# EAGLE board YMotor (EAGLE 9.6.2)
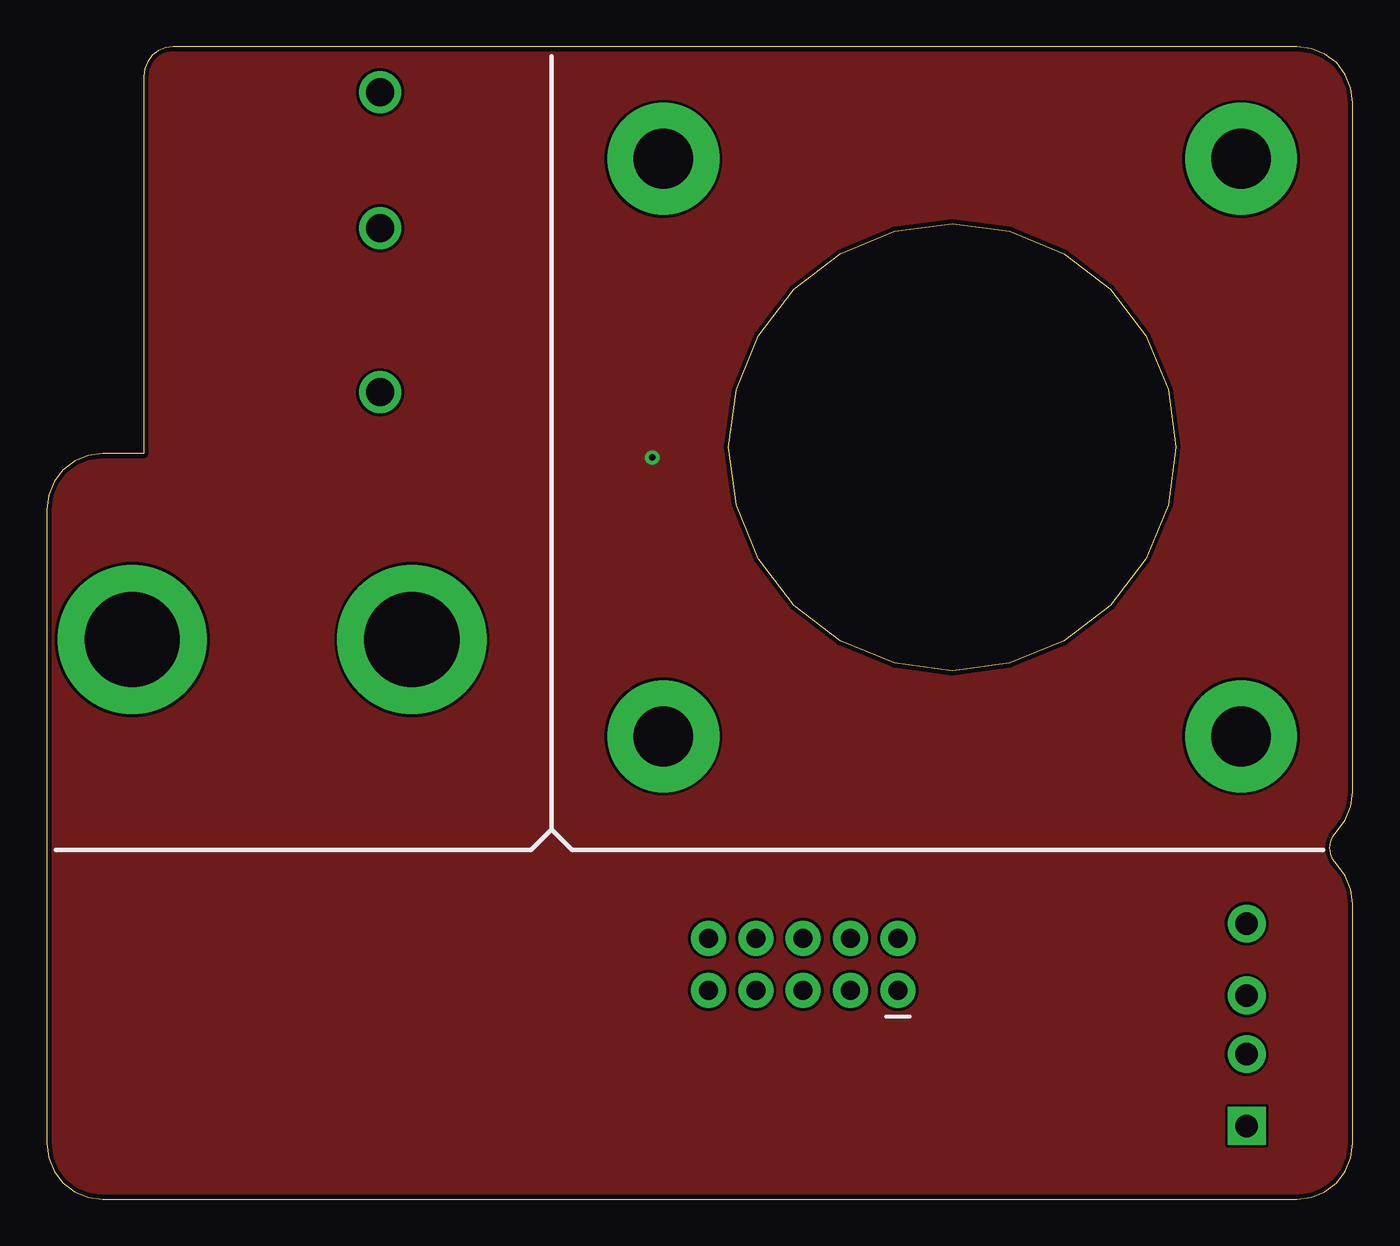
[diagram p0: board, top side]
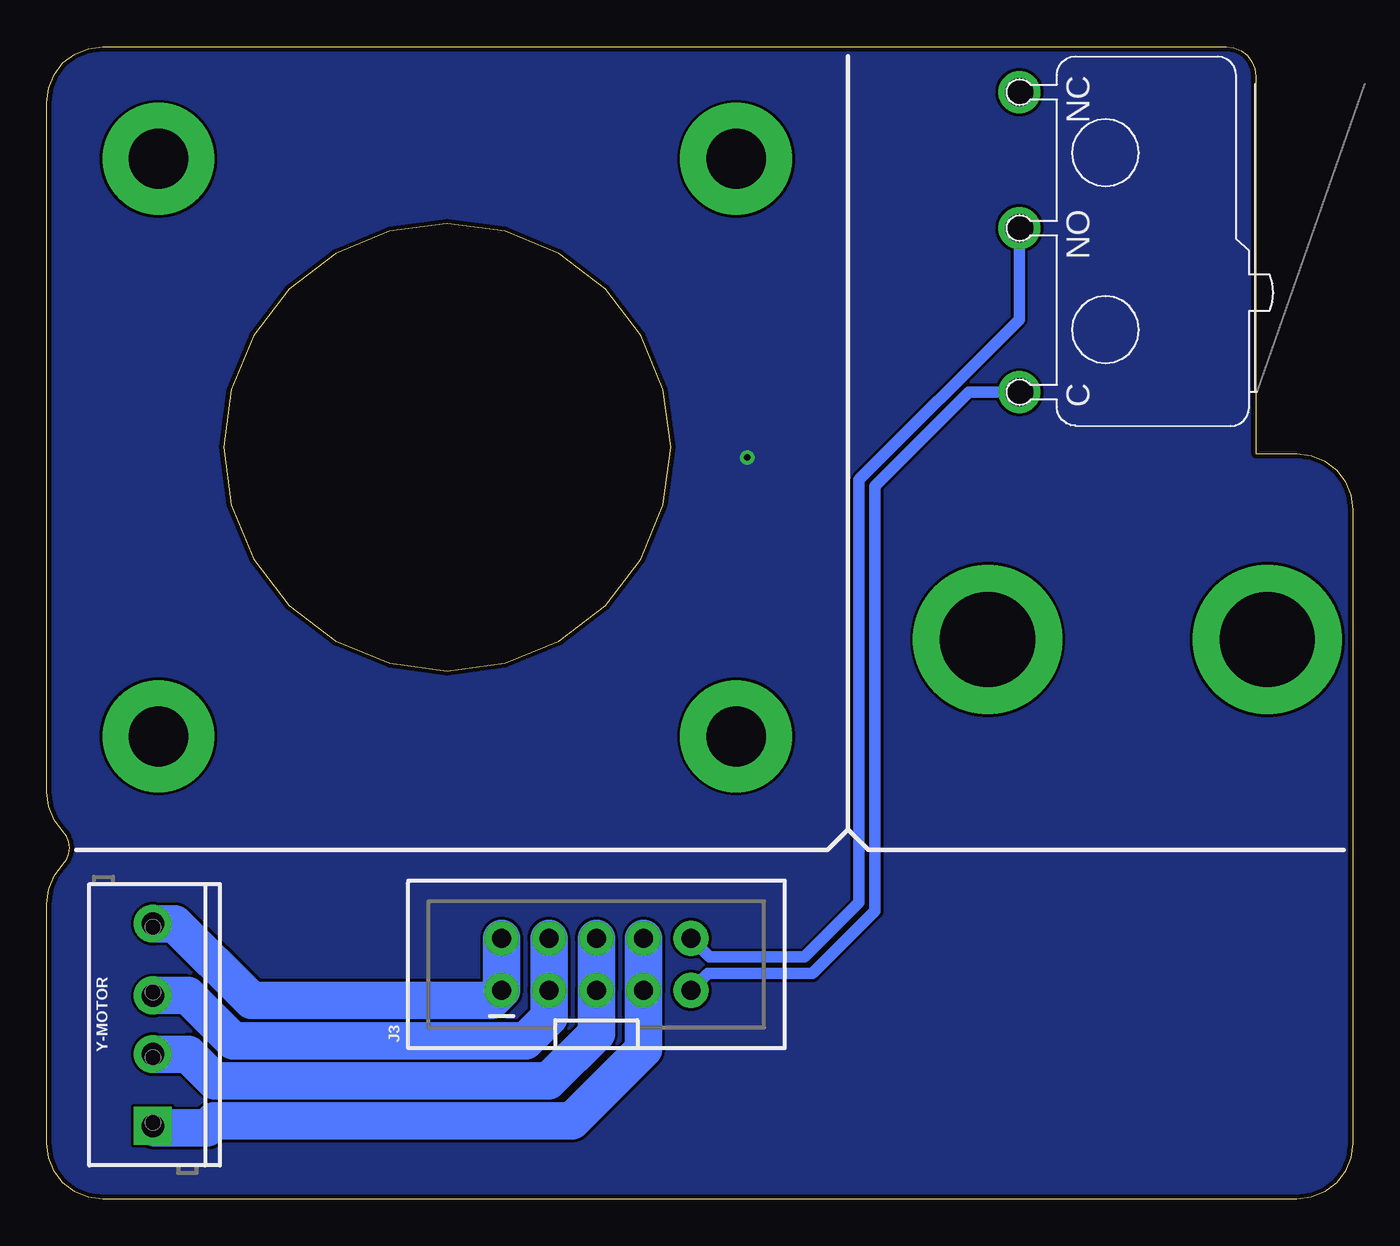
[diagram p1: board, bottom side, seen from below]

Size 70.1 x 61.85 mm. Coordinates in mm from the lower left corner, seen from the top.
Outline: 67.1,61.85 6.8,61.85 6.39,61.79 6,61.63 5.67,61.38 5.41,61.05 5.25,60.66 5.2,60.25 5.2,40 3,40 2.22,39.9 1.5,39.6 0.88,39.12 0.4,38.5 0.1,37.78 0,37 0,3 0.1,2.22 0.4,1.5 0.88,0.88 1.5,0.4 2.22,0.1 3,0 67.1,0 67.88,0.1 68.6,0.4 69.22,0.88 69.7,1.5 70,2.22 70.1,3 70.1,15.85 70,16.62 69.7,17.35 69.22,17.97 69.02,18.22 68.9,18.52 68.86,18.85 68.9,19.17 69.02,19.47 69.22,19.72 69.7,20.35 70,21.07 70.1,21.85 70.1,58.85 70,59.62 69.7,60.35 69.22,60.97 68.6,61.44 67.88,61.74 67.1,61.85
Outline: 36.6,40.35 37.01,43.45 38.21,46.35 40.11,48.83 42.6,50.74 45.49,51.94 48.6,52.35 51.71,51.94 54.6,50.74 57.09,48.83 58.99,46.35 60.19,43.45 60.6,40.35 60.19,37.24 58.99,34.35 57.09,31.86 54.6,29.95 51.71,28.75 48.6,28.35 45.49,28.75 42.6,29.95 40.11,31.86 38.21,34.35 37.01,37.24 36.6,40.35
Copper layers (1*16): Top 0.035mm / dielectric 1.5mm / Bottom 0.035mm
Design rules "default *": minimum track width 6mil, minimum drill 0.35mm, track to track 6mil, track to pad 6mil, pad to pad 6mil, via to via 6mil, smd to smd 6mil, copper to edge 10mil, drill to drill 6mil, minimum pad ring 10mil, minimum via ring 8mil, stop-mask expansion 4mil, vias tented up to drill 0mil, thermal gap 10mil
Net classes: 0 default: width 0.203 mm, clearance 0.152 mm

## Footprints (pad centres in the part's own frame; a part is rotated, then mirrored left to right if it is on the bottom)
2X5-SHROUDED_LOCK = drill 1.016 pad 1.88: 1 -1.397,5.08; 2 1.397,5.08; 3 -1.397,2.54; 4 1.397,2.54; 5 -1.397,0; 6 1.397,0; 7 -1.397,-2.54; 8 1.397,-2.54; 9 -1.397,-5.08; 10 1.397,-5.08
LEVERMICROPCB-LEFTANGLE = drill 1.5: C 7.3,-7.1; NC -8.8,-7.1; NO -1.5,-7.1
SCREWTERMINAL-3.5MM-4_LOCK = drill 1.2 pad 2.032 square: 1 -0.178,0 | drill 1.2 pad 2.032: 2 3.678,0; 3 6.822,0; 4 10.678,0

## Placement (x,y rotation side)
J3  [2X5-SHROUDED_LOCK]  40.6,12.6 90 bottom
U$1  Lever Microswitch Leftangle PCB mount, with Roller style lever, with a red roller  [LEVERMICROPCB-LEFTANGLE]  10.8,50.6 270 bottom
Y-MOTOR  [SCREWTERMINAL-3.5MM-4_LOCK]  64.4,4.1 90 bottom

## Library data of the parts
J3 = SparkFun-Connectors; PROD_ID: CONN-08671; SF_ID: PRT-08506
U$1 = Lever Microswitch Right Angle
Y-MOTOR = SparkFun-Connectors

## Nets
Y-ENDSTOP-C: J3.9 U$1.C
Y-ENDSTOP-NO: J3.10 U$1.NO
Y-MOTOR-1: J3.7 J3.8 Y-MOTOR.1
Y-MOTOR-2: J3.5 J3.6 Y-MOTOR.2
Y-MOTOR-3: J3.3 J3.4 Y-MOTOR.3
Y-MOTOR-4: J3.1 J3.2 Y-MOTOR.4

## Tracks (layer width: path | path; a pad name or v marks a point on that pad's centre or on a via)
GND  (via drill 0.35)
  other vias: 32.5,39.8
  pour Top: -2.9,64.2 -2.9,1.7 0.2,-1.4 70,-1.4 73.1,1.7 73.1,61.3 70.4,64 70.2,64.2
  pour Bottom: -3.5,64.4 -3.5,1.9 -0.4,-1.2 69.4,-1.2 72.5,1.9 72.5,61.5 69.8,64.2 69.6,64.4
N$21  (via drill 3.2 pad 6)
  other vias: 64.1,24.83
N$27  (via drill 5.1 pad 8)
  other vias: 4.6,30.03
N$28  (via drill 5.1 pad 8)
  other vias: 19.6,30.03
N$30  (via drill 3.2 pad 6)
  other vias: 33.1,24.83
N$31  (via drill 3.2 pad 6)
  other vias: 64.1,55.83
Y-ENDSTOP-C
  Bottom 0.61: U$1.C 20.6,43.3 25.64,38.26 25.64,15.46 29,12.1 34.62,12.1 J3.9
Y-ENDSTOP-NO
  Bottom 0.61: J3.10 34.52,13 29.42,13 26.5,15.92 26.5,38.6 17.9,47.2 U$1.NO
Y-MOTOR-1
  Bottom 2: Y-MOTOR.1 64.3,3.82 61.48,3.82 61.11,4.19 41.91,4.19 38.06,8.04 J3.7 J3.8
Y-MOTOR-2
  Bottom 2: Y-MOTOR.2 62.5,7.78 61.07,6.35 43.15,6.35 40.6,8.9 J3.5 J3.6
Y-MOTOR-3
  Bottom 2: Y-MOTOR.3 62.52,10.92 60.1,8.5 44.4,8.5 43.14,9.76 J3.3 J3.4
Y-MOTOR-4
  Bottom 2: Y-MOTOR.4 63.23,14.78 59.11,10.65 46.23,10.65 J3.1 J3.2
YMOTORGND  (via drill 3.2 pad 6)
  other vias: 33.1,55.83